# Altium PCB LiPo Charger.PcbDoc
Units mil, origin at the board's own origin, x right, y up, seen from the top; angles counter-clockwise.
Board outline 2240 x 1260 mil, 2 copper layers (Top Layer, Bottom Layer); 19 components, 14 nets, 53 pads, 2 vias.
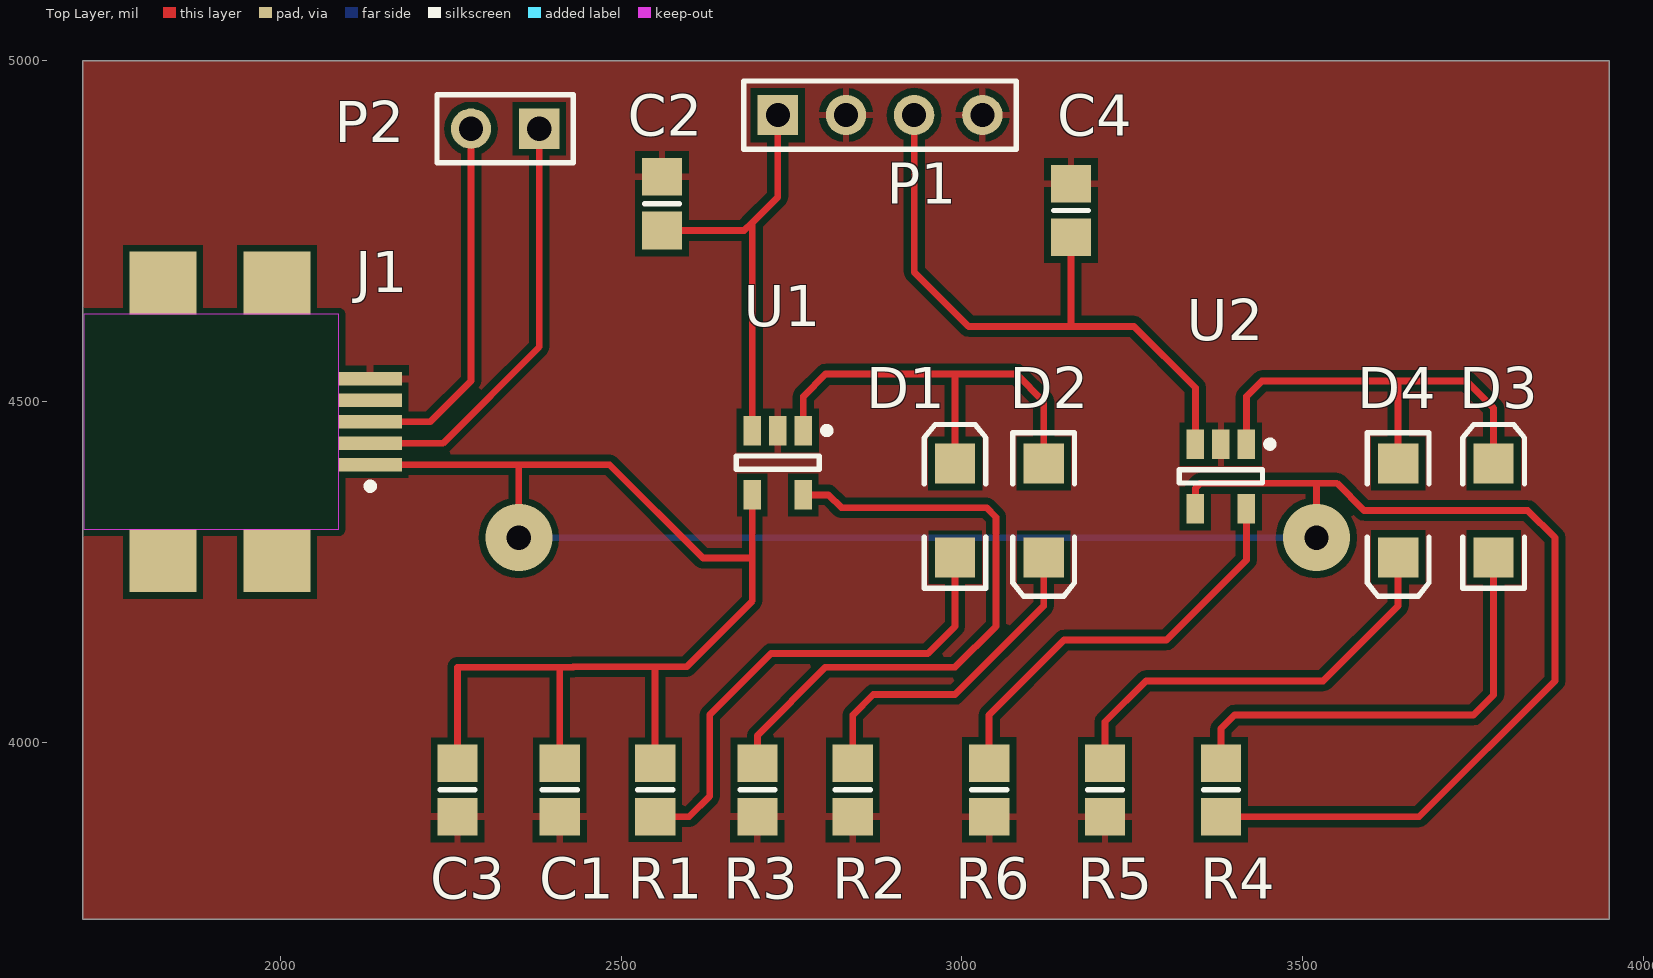
[diagram p0: Top Layer view]
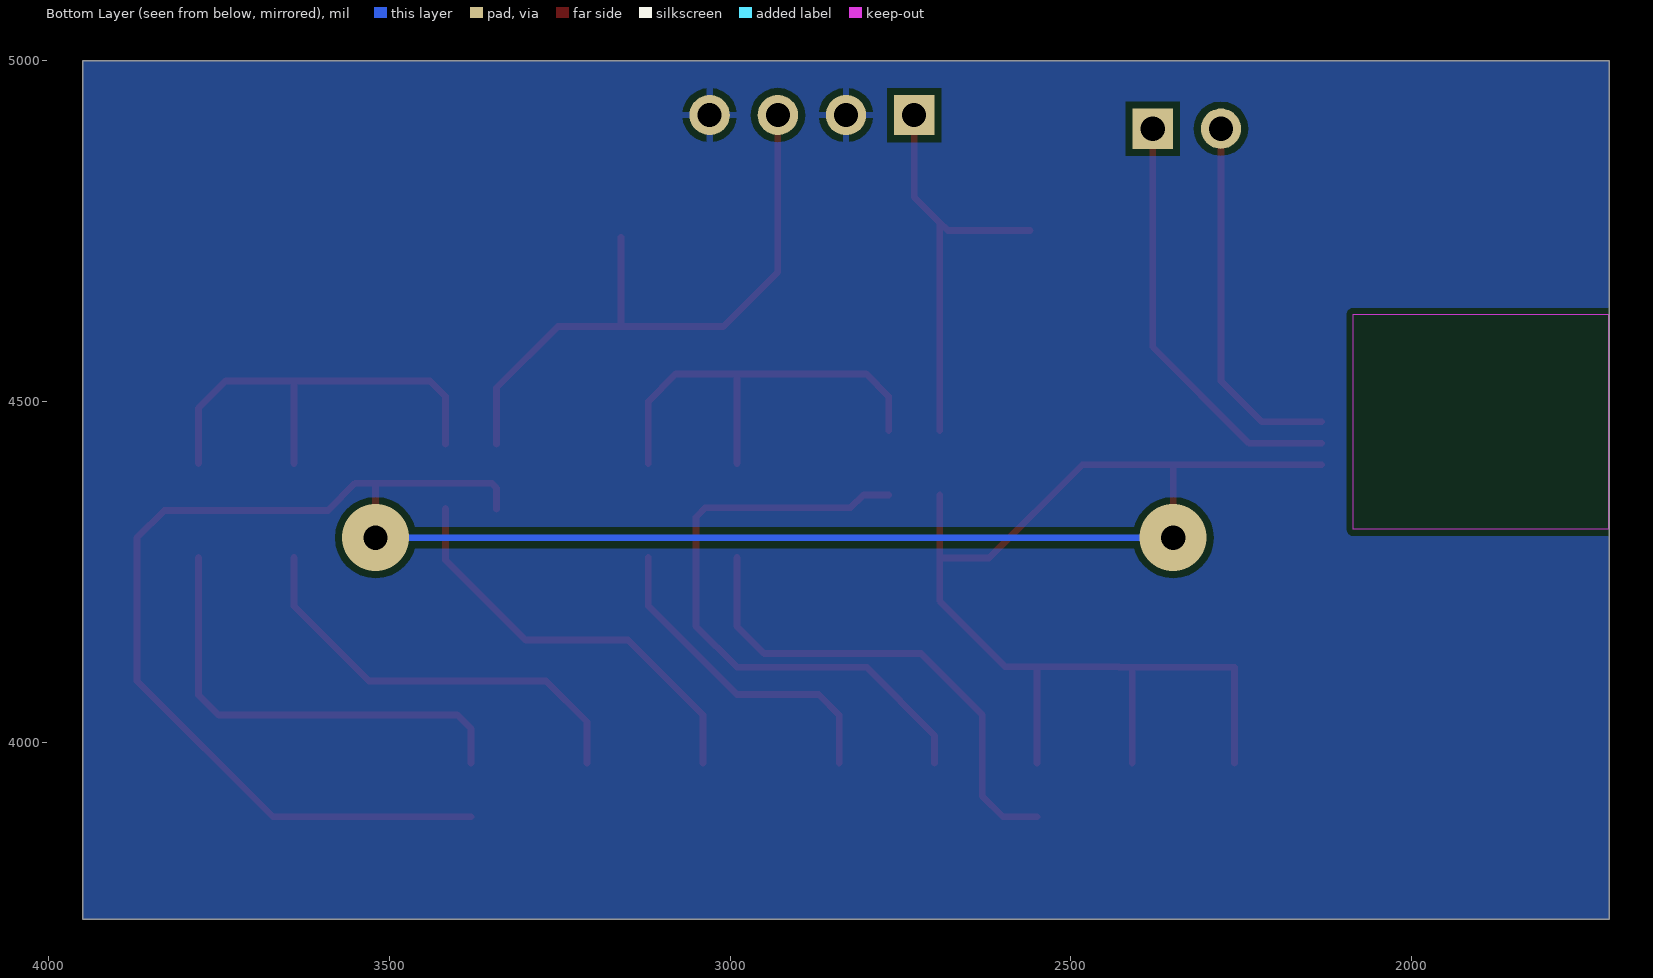
[diagram p1: Bottom Layer view, seen from below]

## Layer stack, top to bottom
Top Layer: signal copper 1.4
Dielectric: dielectric 12.6, FR-4, Dk 4.8
Bottom Layer: signal copper 1.4

## Board outline
3950,5000 1710,5000 1710,3740 3950,3740

## Design rules (kind name [scope] priority, off if disabled: settings)
Clearance [All] p1: gap=10
PolygonConnect [All] p1: connectstyle=Relief reliefconductorwidth=10 reliefentries=4 polygonreliefangle="90 Angle" airgapwidth=10
RoutingVias [All] p1: holewidth=28 width=50 viastyle="Through Hole" minholewidth=28 minwidth=50 maxholewidth=28 maxwidth=50
SolderMaskExpansion [All] p1: expansion=4
Width [All] p1: maxlimit=10 minlimit=10 preferedwidth=10
28 further rules are at their usual default settings.

## Components (designator, comment, footprint, x,y, rotation, side; value= is the part's Value field where it differs from the comment)
C1 "10%" 6-0805_M 2410,3930 r90 top
C2 "10%" 6-0805_M 2560,4790 r270 top
C3 "10%" 6-0805_M 2260,3930 r90 top
C4 "10%" 6-0805_M 3160,4780 r270 top
D1 "LED2 RED" 3.2X1.6X1.1 2990,4340 r90 top
D2 "LED2 Green" 3.2X1.6X1.1 3120,4340 r270 top
D3 "LED2 Red" 3.2X1.6X1.1 3780,4340 r90 top
D4 "LED2 Green" 3.2X1.6X1.1 3640,4340 r270 top
J1 "0481900001" 481900001 1980,4470 r180 top
P1 "Header 4" HDR1X4 2730,4920 r0 top
P2 "Header 2" HDR1X2 2380,4900 r180 top
R1 "1%" 6-0805_M 2550,3930 r270 top
R2 "1%" 6-0805_M 2840,3930 r90 top
R3 "1%" 6-0805_M 2700,3930 r90 top
R4 "1%" 6-0805_M 3380,3930 r90 top
R5 "1%" 6-0805_M 3210,3930 r90 top
R6 "1%" 6-0805_M 3040,3930 r90 top
U1 "MCP73831T-2ACI/OT" SOT-23-OT5_N 2730,4410 r270 top
U2 "MCP73831T-2ACI/OT" SOT-23-OT5_N 3380,4390 r270 top

## Footprints (in the part's own frame and the unit in brackets; to place one, negate y for a bottom-side part, rotate by r counter-clockwise, add the part's x,y. Pads: shape width x height; smd on the part's side, far side on the other; paste and mask are expansions set on the pad)
3.2X1.6X1.1 [mm] "SMT LED; 2 Flat Leads"
  rect 1.5x1.5 smd: 1(-1.75,0) 2(1.75,0)
  silkscreen extent -2.9,-1.15 3.2,1.15
6-0805_M [mm] "Chip Resistor, Body 2.0x1.2mm, IPC Low Density"
  rect 1.4x1.5 smd: 1(-1,0) 2(1,0)
  silkscreen extent 0,-0.65 0,0.65, body extent -1.07,-0.7 1.07,0.7, height 0.7
481900001 [mm] "Connector; USB Mini-B, Sinking Type, SM; 5 Position; Right Angle"
  rect 2.35x0.5 smd: 1(-3.862,1.6) 2(-3.862,0.8) 3(-3.862,0) 4(-3.862,-0.8) 5(-3.862,-1.6)
  rect 2.5x2.35 smd: MH1(-0.388,-5.175) MH2(3.862,-5.175) MH3(3.862,5.175) MH4(-0.388,5.175)
  Keep-Out Layer region: -2.687,-4 6.813,-4 6.813,4 -2.687,4
  silkscreen extent -3.99,2.28 -3.74,2.52, body extent -1.8,-3.84 6.8,3.86, height 0.35
HDR1X2 [mm] "Connector; Header; 2 Position"
  rect 1.5x1.5 hole 0.9: 1(0,0)
  round 1.5 hole 0.9: 2(2.54,0)
  silkscreen extent -1.27,-1.27 3.81,1.27
HDR1X4 [mm] "Connector; Header; 4 Position"
  rect 1.5x1.5 hole 0.9: 1(0,0)
  round 1.5 hole 0.9: 2(2.54,0) 3(5.08,0) 4(7.62,0)
  silkscreen extent -1.27,-1.27 8.89,1.27
SOT-23-OT5_N [mm] "SOT23, 5-Leads, Body 2.9x1.6mm, Pitch 0.95mm, Lead Span 2.7mm, IPC Medium Density"
  rect 1.1x0.65 smd: 1(-1.2,0.95) 2(-1.2,0) 3(-1.2,-0.95) 4(1.2,-0.95) 5(1.2,0.95)
  silkscreen extent -1.32,-1.55 0.25,1.95, body extent -0.9,-1.55 0.9,1.55, height 1.45

## Part data
C1 C2 C3 C4: library part Cap, "Capacitor"
D1 D2 D3 D4: library part LED2, "Typical RED, GREEN, YELLOW, AMBER GaAs LED"
J1: "USB On-The-Go (OTG) Mini-B Receptacle, Right Angle, SMT, 0.80mm (.031\") Pitch, Solder Tabs with Back Cover, Recessed Type"
P1: "Header, 4-Pin"
P2: "Header, 2-Pin"
R1 R2 R3 R4 R5 R6: library part Res1, "Resistor"
U1 U2: "Miniature Single-Cell, Fully Integrated Li-Ion, Li-Polymer Charge Management Controller, 4.2V, 5-Pin SOT-23, Industrial Temperature, Tape and Reel"

## Via types
v1: diameter 98.43, hole 35.43, Top Layer to Bottom Layer, 2 vias

## Nets (pads, with @x,y where several pads share a name; then routed paths per layer and width w, separated by ;. In a path a pad name is that pad's centre, name@x,y a point inside that pad or via, vN(x,y) a via of type N, cw(c..) or ccw(c..) an arc to the next point about the centre after c; other vN are vias at no path point)
5VUSB: C1.2 C3.2 J1.1 R1.1 R4.1 U1.4 U2.4 | length 4402.3
  Top Layer w10: J1.1 2350,4407.01 ; C3.2 2260,4110 2410,4110 ; v1(2350,4300) 2350,4407.01 ; C1.2 2410,4110 ; R1.1 2550,4110.63 ; U1.4 2692.6,4270 ; U2.4@3342.6,4342 U2.4 3342.6,4372.6 3350,4380 3520,4380 ; R4.1 3670.63,3890.63 3870,4090 3870,4300 3830,4340 3590,4340 3550,4380 3520,4380 ; v1(3520,4300) 3520,4380 ; 2350,4407.01 2482.99,4407.01 2620,4270 2692.6,4270 ; 2410,4110 2430,4110 2430,4110.63 2550,4110.63 ; 2550,4110.63 2595.83,4110.63 2692.6,4207.4 2692.6,4270
  Bottom Layer w10: v1(2350,4300) v1(3520,4300)
CHARGE1: C2.2 P1.1 U1.3 | length 605.8
  Top Layer w10: C2.2 2680.63,4750.63 2692.6,4762.6 ; U1.3 2692.6,4762.6 ; P1.1@2730,4910 2730,4800 2692.6,4762.6
CHARGE2: C4.2 P1.3 U2.3 | length 916.4
  Top Layer w10: P1.3@2930,4910 2930,4690 3010,4610 3160,4610 ; C4.2 3160,4610 ; U2.3 3342.6,4520 3252.6,4610 3160,4610
GND: C1.1 C2.1 C3.1 C4.1 J1.5 P1.2 P1.4 R2.1 R3.1 R5.1 R6.1 U1.2 U2.2
NetD1_1: D1.1 R1.2 | length 726.7
  Top Layer w10: R1.2 2600,3890.63 2630,3920.63 2630,4040 2720,4130 2950,4130 2990,4170 D1.1
NetD1_2: D1.2 D2.1 U1.1 | length 655
  Top Layer w10: U1.1 2767.4,4507.4 2800,4540 2990,4540 ; D1.2 2990,4540 ; D2.1 3120,4500 3080,4540 2990,4540
NetD2_2: D2.2 R2.2 | length 488
  Top Layer w10: R2.2 2840,4040 2870,4070 2990,4070 3120,4200 D2.2
NetD3_1: D3.1 R4.2 | length 672.8
  Top Layer w10: R4.2 3380,4020 3400,4040 3750.63,4040 3780,4069.37 D3.1
NetD3_2: D3.2 D4.1 U2.1 | length 660.9
  Top Layer w10: U2.1 3417.4,4507.4 3440,4530 3640,4530 ; D4.1 3640,4530 ; D3.2 3780,4490 3740,4530 3640,4530
NetD4_2: D4.2 R5.2 | length 632.1
  Top Layer w10: R5.2 3210,4030 3270,4090 3530,4090 3640,4200 D4.2
NetJ1_2: J1.2 P2.1 | length 626.5
  Top Layer w10: J1.2 2238.5,4438.5 2380,4580 P2.1
NetJ1_3: J1.3 P2.2 | length 542.8
  Top Layer w10: J1.3 2220,4470 2280,4530 P2.2
NetR3_2: R3.2 U1.5 | length 913.1
  Top Layer w10: R3.2 2700,4010 2800,4110 2990,4110 3050,4170 3050,4330 3036,4344 2823.13,4344 2804.37,4362.76 U1.5
NetR6_2: R6.2 U2.5 | length 617.6
  Top Layer w10: R6.2 3040,4040 3150,4150 3300,4150 3417.4,4267.4 U2.5
pads on no net: J1.4 J1.MH1 J1.MH2 J1.MH3 J1.MH4

## Polygon pours and split planes (outlines as drawn)
GND on Bottom Layer "GND" (solid, remove dead copper, pour order 3): 3950,5000 1710,5000 1710,3740 3950,3740
GND on Top Layer "GND" (solid, remove dead copper, pour order 6): 1710,5000 3950,5000 3950,3740 1710,3740